# Altium PCB SteeringWheel_v2.PcbDoc
Units mm, origin at the board's own origin, x right, y up, seen from the top; angles counter-clockwise.
Board outline 76.9 x 45 mm, 2 copper layers (Top Layer, Bottom Layer); 28 components, 59 nets, 189 pads, 5 vias.
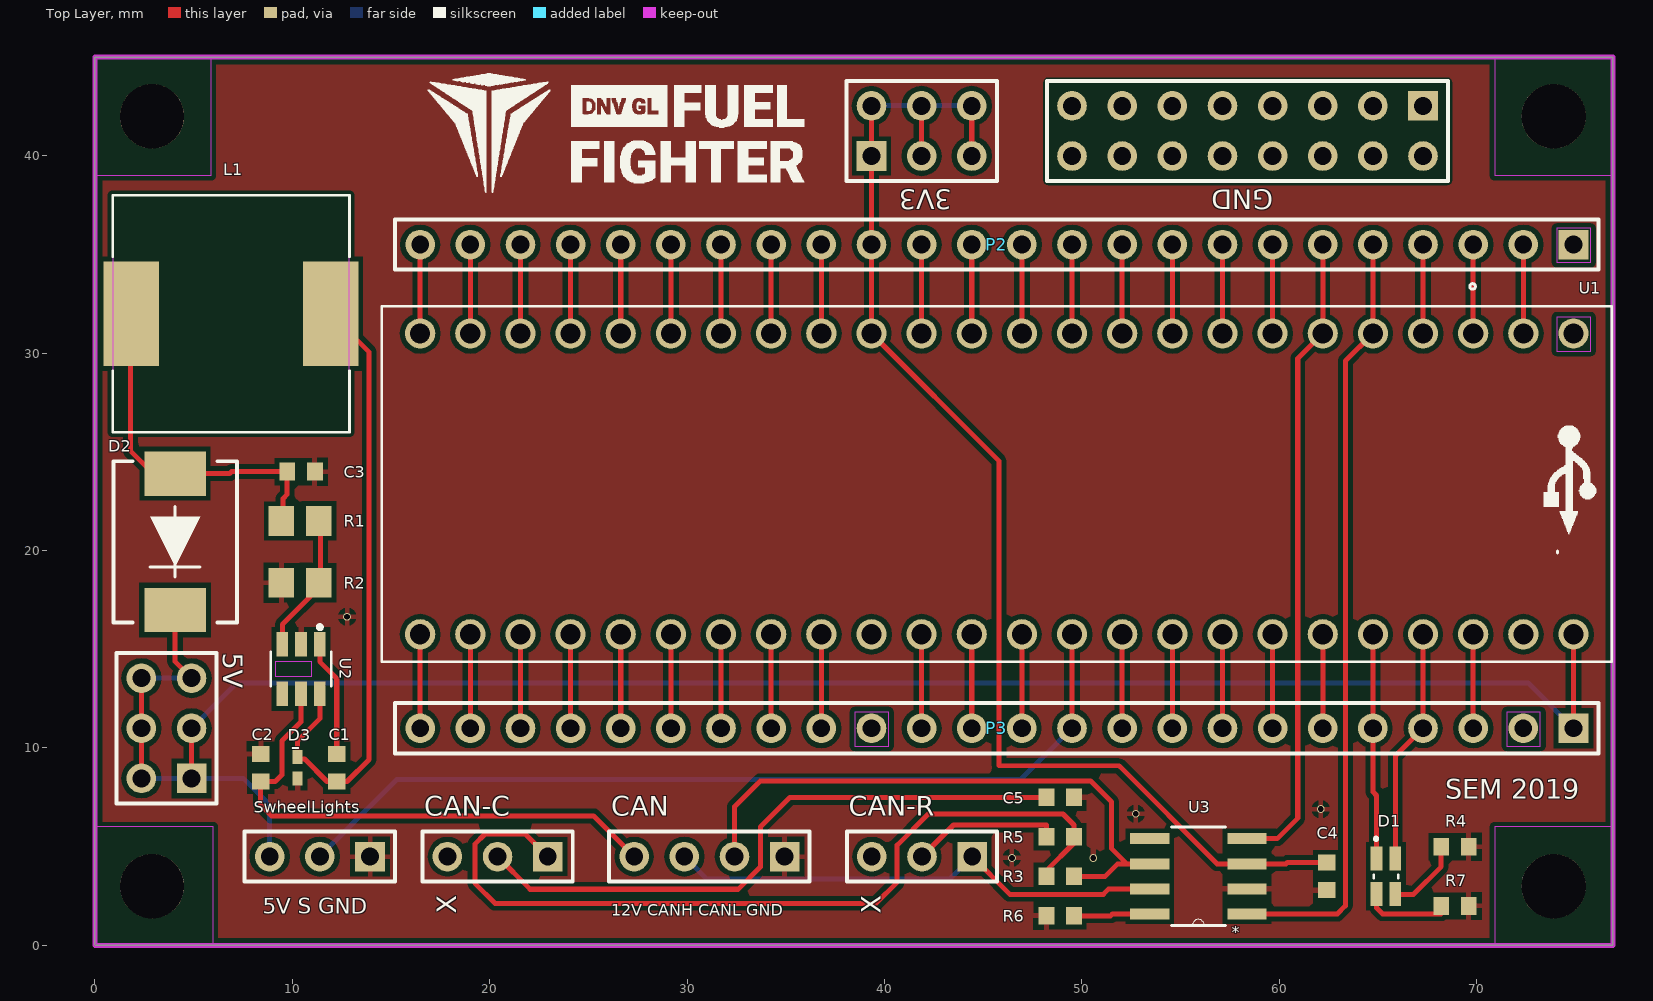
[diagram p0: Top Layer view]
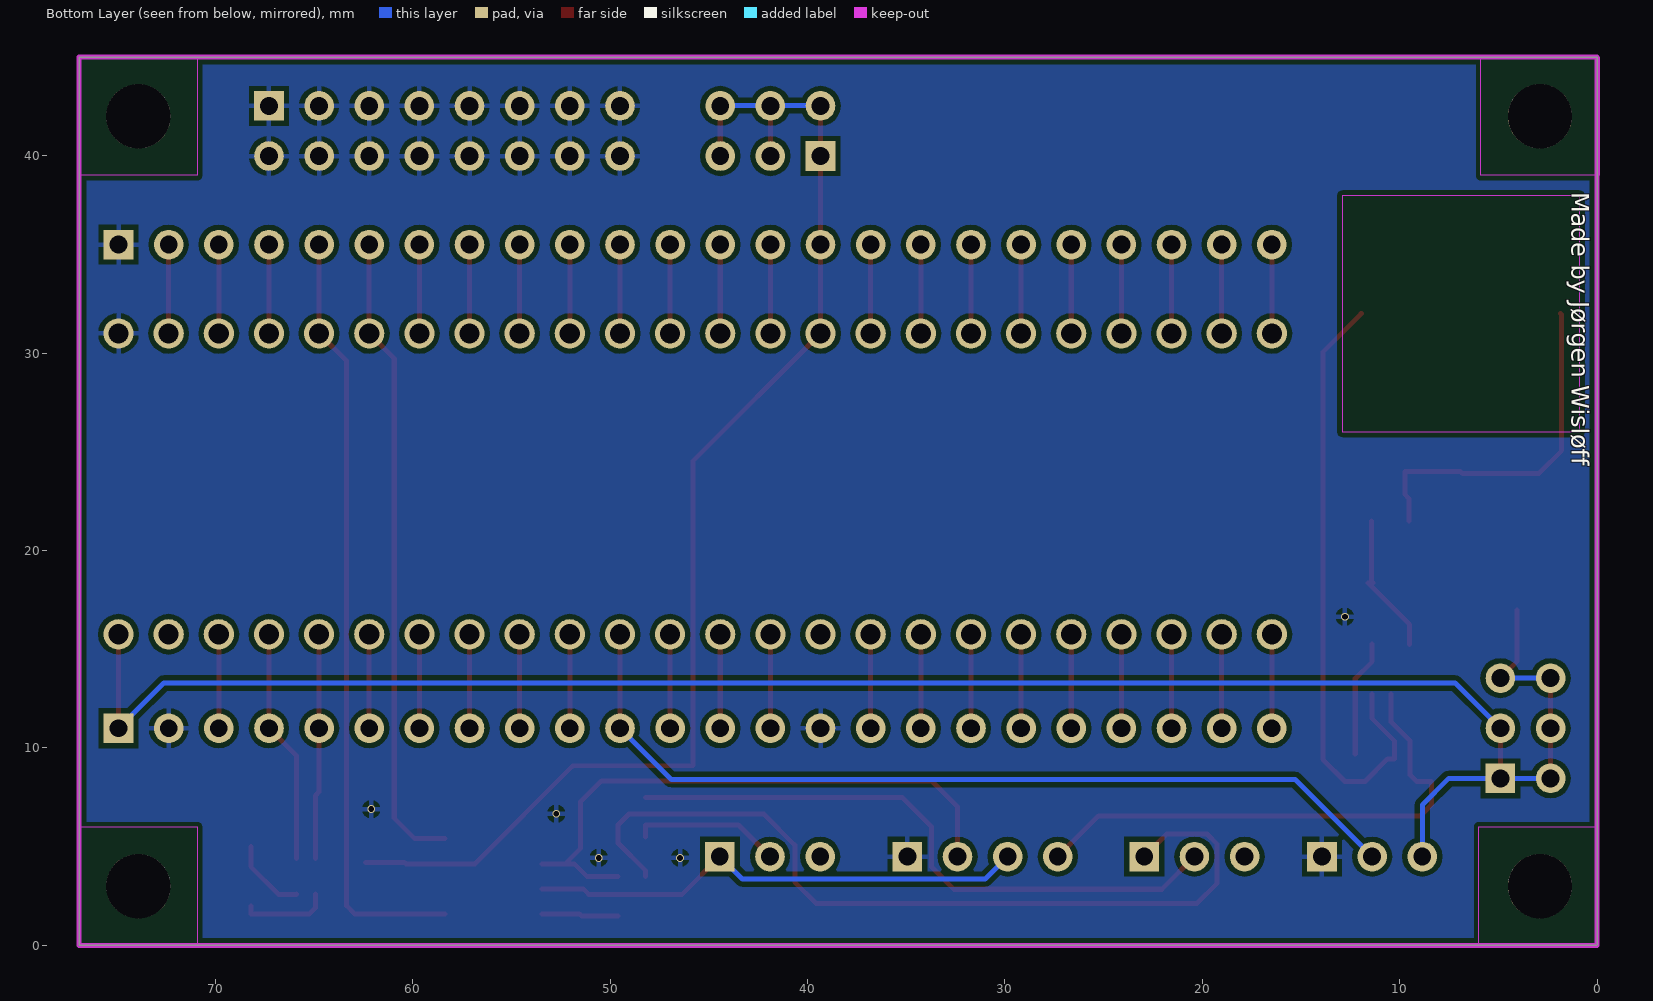
[diagram p1: Bottom Layer view, seen from below]

## Layer stack, top to bottom
Top Solder: solder mask 0.0102, Solder Resist, Dk 3.5
Top Layer: signal copper 0.0356
Dielectric 1: dielectric 0.32, FR-4, Dk 4.8
Bottom Layer: signal copper 0.0356
Bottom Solder: solder mask 0.0102, Solder Resist, Dk 3.5

## Board outline
0,0 76.9,0 76.9,45 0,45

## Design rules (kind name [scope] priority, off if disabled: settings)
Clearance [All] p1: gap=0.254 ignorepadtopadclearanceinfootprint=FALSE except(0: Arc-Hole Track-Hole SMDPad-Hole THPad-Hole Via-Hole Fill-Hole Poly-Hole Region-Hole Text-Hole)
PolygonConnect [All] p1: connectstyle=Relief reliefconductorwidth=0.254 reliefentries=4 polygonreliefangle="90 Angle" airgapwidth=0.254
RoutingVias [All] p1: holewidth=0.711 width=1.27 viastyle="Through Hole" minholewidth=0.711 minwidth=1.27 maxholewidth=0.711 maxwidth=1.27
SolderMaskExpansion [All] p1: expansion=0.102
Width [All] p1: maxlimit=0.254 minlimit=0.254 preferedwidth=0.254
30 further rules are at their usual default settings.

## Components (designator, comment, footprint, x,y, rotation, side; value= is the part's Value field where it differs from the comment)
3V3 "Header 3X2" HDR2X3 39.34,39.984 r0 top
5V "Header 3X2" HDR2X3 4.9,8.46 r90 top
C1 "29.6mOhm" 1608[0603] 12.254,9 r90 top value=100nF
C2 "4.796mOhm" 1608[0603] 8.4,9 r270 top value=3.3uF
C3 "4.796mOhm" 1608[0603] 10.446,24 r180 top value=3.3uF
C4 "" 1608[0603] 62.4,3.5 r90 top value=100nF
C5 "4.796mOhm" 1608[0603] 48.9,7.5 r180 top value=100nF
CAN "Header 4" HDR1X4 34.94,4.5 r180 top
CAN-C "Header 3" HDR1X3 22.94,4.5 r180 top
CAN-R "Header 3" HDR1X3 44.44,4.5 r180 top
D1 "APHBM2012LVBDZGKC" *KINGBRIGHT_APHBM2012LVBDZGKC 65.4,3.5 r270 top
D2 "SMC30J12A" *DIOM7959X265_SMC30J12A(Primary) 4.066,20.446 r90 top
D3 "550mV, 100mA" *SOD523 10.273,9 r270 top
GND "Header 8X2" HDR2X8 67.28,42.524 r180 top
L1 "Inductor" *IND_SRR1210-220M 6.9,32 r270 top value="180uH 250mOhm"
P2 "Header 24" HDR1X24 74.9,35.5 r180 top
P3 "Header 24" HDR1X24 74.9,11 r180 top
R1 "Res2" *RESC2012X60 10.4,21.5 r180 top value=111kOhm
R2 "Res2" *RESC2012X60 10.4,18.37 r0 top value=20kOhm
R3 "Res2" 1608[0603] 48.9,3.5 r180 top value=60
R4 "Res2" 1608[0603] 68.9,5 r0 top value=250
R5 "Res2" 1608[0603] 48.9,5.5 r180 top value=60
R6 "Res2" 1608[0603] 48.9,1.5 r180 top value=22K
R7 "Res2" 1608[0603] 68.9,2 r0 top value=250
SwheelLights "Header 3" HDR1X3 13.94,4.5 r180 top
U1 "DEV-14058" *SPARKFUN_DEV-14058_DEV-14058(Primary) 45.69,23.38 r270 top
U2 "LMR14010ADDC" *SOT95P280X110-6N 10.446,14 r270 top
U3 "SN65HVD231D" *SOIC127P600X175-8N 55.9,3.5 r180 top

## Footprints (in the part's own frame and the unit in brackets; to place one, negate y for a bottom-side part, rotate by r counter-clockwise, add the part's x,y. Pads: shape width x height; smd on the part's side, far side on the other; paste and mask are expansions set on the pad)
1608[0603] [mm] "Chip Capacitor, Body 1.6x0.8mm, IPC High Density"
  rect 0.8x0.9 smd: 1(-0.7,0) 2(0.7,0)
  body extent -0.87,-0.48 0.87,0.48, height 1.3
*DIOM7959X265_SMC30J12A(Primary) [mm]
  rect 2.25x3.12 smd: A(3.455,0) C(-3.455,0)
  silkscreen extent -4.08,-3.13 4.08,3.13
*IND_SRR1210-220M [mm]
  rect 5.3x2.8 smd: 1(0,5.05) 2(0,-5.05)
  silkscreen extent -6,-6 6,6
*KINGBRIGHT_APHBM2012LVBDZGKC [mm]
  rect 1.2x0.6 smd: 1(-0.9,-0.475) 2(0.9,-0.475) 3(0.9,0.475) 4(-0.9,0.475)
  silkscreen extent -1.98,-0.63 0.09,0.62
*RESC2012X60 [mm]
  rect 1.3x1.5 smd: 1(-0.95,0) 2(0.95,0)
*SOD523 [mm]
  rect 0.7x0.5 smd: 1(0.55,0) 2(-0.55,0)
*SOIC127P600X175-8N [mil]
  rect 78x22 smd: 1(-97,75) 2(-97,25) 3(-97,-25) 4(-97,-75) 5(97,-75) 6(97,-25) 7(97,25) 8(97,75)
  silkscreen extent -54,-98 54,98
*SOT95P280X110-6N [mm]
  rect 1.25x0.59 smd: 1(-1.255,0.95) 2(-1.255,0) 3(-1.255,-0.95) 4(1.255,-0.95) 5(1.255,0) 6(1.255,0.95)
  silkscreen extent -2.22,-1.53 0.88,1.53
*SPARKFUN_DEV-14058_DEV-14058(Primary) [mm]
  round 1.53 hole 1.02: 0(-7.62,26.67) 1(-7.62,24.13) 2(-7.62,21.59) 3(-7.62,19.05) 3V3_1(-7.62,-6.35) 3V3_2(7.62,24.13) 4(-7.62,16.51) 5(-7.62,13.97) 6(-7.62,11.43) 7(-7.62,8.89) 8(-7.62,6.35) 9(-7.62,3.81) 10(-7.62,1.27) 11(-7.62,-1.27) 12(-7.62,-3.81) 13(7.62,-3.81) 14(7.62,-1.27) 15(7.62,1.27) 16(7.62,3.81) 17(7.62,6.35) 18(7.62,8.89) 19(7.62,11.43) 20(7.62,13.97) 21(7.62,16.51) 22(7.62,19.05) 23(7.62,21.59) 24(-7.62,-8.89) 25(-7.62,-11.43) 26(-7.62,-13.97) 27(-7.62,-16.51) 28(-7.62,-19.05) 29(-7.62,-21.59) 30(-7.62,-24.13) 31(-7.62,-26.67) 32(-7.62,-29.21) 33(7.62,-29.21) 34(7.62,-26.67) 35(7.62,-24.13) 36(7.62,-21.59) 37(7.62,-19.05) 38(7.62,-16.51) 39(7.62,-13.97) A21(7.62,-11.43) A22(7.62,-8.89) AGND(7.62,26.67) GND_1(-7.62,29.21) GND_2(7.62,-6.35) VIN(7.62,29.21)
  silkscreen extent -10.14,-31.15 9,31.15
HDR1X3 [mm] "Connector; Header; 3 Position"
  rect 1.5x1.5 hole 0.9: 1(0,0)
  round 1.5 hole 0.9: 2(2.54,0) 3(5.08,0)
  silkscreen extent -1.27,-1.27 6.35,1.27
HDR1X4 [mm] "Connector; Header; 4 Position"
  rect 1.5x1.5 hole 0.9: 1(0,0)
  round 1.5 hole 0.9: 2(2.54,0) 3(5.08,0) 4(7.62,0)
  silkscreen extent -1.27,-1.27 8.89,1.27
HDR1X24 [mm] "Connector; Header; 24 Position"
  rect 1.5x1.5 hole 0.9: 1(0,0)
  round 1.5 hole 0.9: 2(2.54,0) 3(5.08,0) 4(7.62,0) 5(10.16,0) 6(12.7,0) 7(15.24,0) 8(17.78,0) 9(20.32,0) 10(22.86,0) 11(25.4,0) 12(27.94,0) 13(30.48,0) 14(33.02,0) 15(35.56,0) 16(38.1,0) 17(40.64,0) 18(43.18,0) 19(45.72,0) 20(48.26,0) 21(50.8,0) 22(53.34,0) 23(55.88,0) 24(58.42,0)
  silkscreen extent -1.27,-1.27 59.69,1.27
HDR2X3 [mm] "Connector; Header; 3x2 Position"
  rect 1.5x1.5 hole 0.9: 1(0,0)
  round 1.5 hole 0.9: 2(0,2.54) 3(2.54,0) 4(2.54,2.54) 5(5.08,0) 6(5.08,2.54)
  silkscreen extent -1.27,-1.27 6.35,3.81
HDR2X8 [mm] "Connector; Header; 8x2 Position"
  rect 1.5x1.5 hole 0.9: 1(0,0)
  round 1.5 hole 0.9: 2(0,2.54) 3(2.54,0) 4(2.54,2.54) 5(5.08,0) 6(5.08,2.54) 7(7.62,0) 8(7.62,2.54) 9(10.16,0) 10(10.16,2.54) 11(12.7,0) 12(12.7,2.54) 13(15.24,0) 14(15.24,2.54) 15(17.78,0) 16(17.78,2.54)
  silkscreen extent -1.27,-1.27 19.05,3.81

## Part data
3V3 5V: "Header, 3-Pin, Dual row", LatestRevisionDate=17-Jul-2002, LatestRevisionNote="Re-released for DXP Platform.", Publisher="Altium Limited"
C1 C2 C3 C4 C5: library part Cap, "Capacitor", LatestRevisionDate=17-Jul-2002, LatestRevisionNote="Re-released for DXP Platform.", PackageDescription="Radial Cap, Thru-Hole; 2 Leads; 0.3 in Pin Spacing", PackageReference=RAD-0.3, Published=8-Jun-2000, Publisher="Altium Limited"
CAN: "Header, 4-Pin", LatestRevisionDate=17-Jul-2002, LatestRevisionNote="Re-released for DXP Platform.", Publisher="Altium Limited"
CAN-C CAN-R SwheelLights: "Header, 3-Pin", LatestRevisionDate=17-Jul-2002, LatestRevisionNote="Re-released for DXP Platform.", Publisher="Altium Limited"
D1: "HELI Colour; 2.0X1.2MM LOW CURRENT BLUE/GREEN SMD LED", Package="0805 Kingbright", Availability=Unavailable, MF=Kingbright, MP=APHBM2012LVBDZGKC, Price=None, SnapEDA_Link=https://www.snapeda.com/parts/APHBM2012LVBDZGKC/Kingbright/view-part/?ref=snap
D2: "Transient Voltage Suppressor, TVS, Transil SMC30J Series, Unidirectional, 12 V, DO-214AB, 2", Package="DO-214 STMicroelectronics", Availability=Unavailable, MF=STMicroelectronics, MP=SMC30J12A, Price=None, SnapEDA_Link=https://www.snapeda.com/parts/SMC30J12A/STMicroelectronics/view-part/?ref=snap
D3: library part "D Zener", "Zener Diode", LatestRevisionDate=17-Jul-2002, LatestRevisionNote="Re-released for DXP Platform.", PackageDescription="Diode, Thru-Hole; 2 Leads; 0.7 in Pin Spacing", PackageReference=DIODE-0.7, Published=8-Jun-2000, Publisher="Altium Limited"
GND: "Header, 8-Pin, Dual row", LatestRevisionDate=17-Jul-2002, LatestRevisionNote="Re-released for DXP Platform.", Publisher="Altium Limited"
P2 P3: "Header, 24-Pin", LatestRevisionDate=17-Jul-2002, LatestRevisionNote="Re-released for DXP Platform.", Publisher="Altium Limited"
R1 R2 R3 R4 R5 R6 R7: "Resistor", LatestRevisionDate=17-Jul-2002, LatestRevisionNote="Re-released for DXP Platform.", PackageDescription="Axial Device, Thru-Hole; 2 Leads; 0.4 in Pin Spacing", PackageReference=AXIAL-0.4, Published=8-Jun-2000, Publisher="Altium Limited"
U1: "Teensy 3.6 _Headers_", Package=None, Digi-Key_Part_Number=1568-1465-ND, Digi-Key_Purchase_URL=https://www.digikey.no/product-detail/en/sparkfun-electronics/DEV-14058/1568-1465-ND/6569369?utm_source=snapeda&utm_medium=aggregator&utm_campaign=symbol, MF="SparkFun Electronics", MP=DEV-14058, SnapEDA_Link=https://www.snapeda.com/parts/DEV-14058/SparkFun%20Electronics/view-part/?ref=snap
U3: "3.3V CAN Transceiver with Sleep Mode, 17 mA, 3.3 V, -40 to 85 degC, 8-pin SOIC (D), Green (RoHS & no Sb/Br)", Drivers Per Package=1, Low Power Mode=Sleep, Manufacturer="Texas Instruments", Rating=Catalog, Supplier Part Number 1=296-12206-5-ND, Supply Voltage(s)(V)=3.3, Code_JEDEC=MS-012AA, ComponentLink1Description=Datasheet, ComponentLink1URL=http://www.ti.com/general/docs/lit/getliterature.tsp?genericPartNumber=SN65HVD231&fileType=pdf, DatasheetVersion=SLOS346K, Eco-Plan="Green (RoHS & no Sb/Br)", Features="Bus Wake Up", ICC(Max)(mA)=17, Isolated=No, Mounting Technology="Surface Mount", PackageDescription="8-Pin Plastic Small Outline Integrated Circuit, 4.9 x 3.9 mm, Pitch 1.27 mm Pitch", PackageReference=D8, PackageVersion="revM, Jun-2011", PartNumber=SN65HVD231D, Receivers Per Package=1, SubFamily=CAN, Supplier 1=Digi-Key, Supplier 2=Farnell, Supplier 3=Newark, Supplier 4=Mouser, Supplier Part Number 2=1106059, Supplier Part Number 3=75C7748, Supplier Part Number 4=595-SN65HVD231D, Transient Pulse Protection(V)="-25 to 25"
L1: Code_IEC=1005, Code_JEITA=0402, LatestRevisionDate=29-May-2009, LatestRevisionNote="IPC-7351 Footprint Added.", PackageDescription="Chip Inductor", PackageReference=0402-A, Published=8-Jun-2000, Publisher="Altium Limited"

## Free pads (board coordinates)
  round 3.25 hole 3.25: 2(2.9,3) 2(2.9,42) 2(73.9,3) 2(73.9,42)

## Via types
v1: diameter 0.4, hole 0.3, Top Layer to Bottom Layer, 5 vias

## Nets (pads, with @x,y where several pads share a name; then routed paths per layer and width w, separated by ;. In a path a pad name is that pad's centre, name@x,y a point inside that pad or via, vN(x,y) a via of type N, cw(c..) or ccw(c..) an arc to the next point about the centre after c; other vN are vias at no path point)
3V3: 3V3.1 3V3.2 3V3.3 3V3.4 3V3.5 3V3.6 C4.2 P2.15 U1.3V3_1 U3.3 | length 64.9
  Top Layer w0.254: 3V3.2@39.34,42.54 3V3.2 3V3.1 P2.15 U1.3V3_1 45.795,24.545 45.795,9.119 51.886,9.093 56.844,4.135 U3.3 60.349,4.135 60.414,4.2 C4.2 ; 3V3.3@41.88,40 3V3.4 3V3.4@41.88,42.54 ; 3V3.5@44.42,40 3V3.6 3V3.6@44.42,42.54
  Bottom Layer w0.254: 3V3.2@39.34,42.54 3V3.6@44.42,42.54
+5: 5V.1 5V.2 5V.3 5V.4 5V.5 5V.6 D2.C P3.1 SwheelLights.3 U1.VIN | length 100.3
  Top Layer w0.254: 5V.2 5V.4 5V.6 ; D2.C 4.066,14.374 5V.5 ; 5V.1 5V.3 ; P3.1 U1.VIN
  Bottom Layer w0.254: 5V.2 5V.1 7.512,8.46 8.86,7.112 SwheelLights.3 ; 5V.6 5V.5 ; 5V.3 7.2,13.3 72.6,13.3 P3.1
+12: C2.2 CAN.4 U2.5 | length 26.9
  Top Layer w0.254: U2.5 10.446,11.328 9.473,10.355 9.473,8.636 9.137,8.3 C2.2 8.4,7.112 8.959,6.553 25.267,6.553 CAN.4
GND: C2.1 C3.1 C4.1 C5.1 CAN.1 D3.1 GND.1 GND.2 GND.3 GND.4 GND.5 GND.6 GND.7 GND.8 GND.9 GND.10 GND.11 GND.12 GND.13 GND.14 GND.15 GND.16 P2.1 P3.2 P3.15 R2.1 R4.2 R6.2 R7.2 SwheelLights.1 U1.GND_1 U2.2 U3.2
  other v1: 46.454,4.435 50.573,4.435 52.727,6.669 62.1,6.9 12.778,16.65
NetC1_1: C1.1 D3.2 L1.1 U2.6 | length 31.7
  Top Layer w0.254: U2.6 11.396,11.486 10.273,10.363 D3.2 10.273,9.449 10.616,9.449 11.765,8.3 C1.1 12.778,8.3 13.9,9.422 13.9,30.05 L1.1
NetC1_2: C1.2 U2.1 | length 5.9
  Top Layer w0.254: U2.1 11.396,14.376 12.254,13.518 C1.2
NetC3_2: C3.2 D2.A L1.2 R1.2 | length 18
  Top Layer w0.254: L1.2 1.8,31.95 1.8,25.06 2.959,23.901 D2.A 6.831,23.901 6.931,24 C3.2 9.746,22.846 9.531,22.631 R1.2@9.531,21.5
NetC5_2: C5.2 CAN-C.2 | length 31.6
  Top Layer w0.254: CAN-C.2 22.055,2.845 32.587,2.845 33.719,3.977 33.719,6.009 35.21,7.5 C5.2
NetCAN-C_1: CAN-C.1 R3.2 R5.1 | length 43.5
  Top Layer w0.254: CAN-C.1 21.801,5.639 19.76,5.639 19.252,5.131 19.252,3.15 20.268,2.134 39.572,2.134 40.639,3.2 40.639,5.08 42.214,6.655 49.041,6.655 49.6,6.096 R5.1 49.6,5.185 48.2,3.785 R3.2
NetCAN-R_2: CAN-R.2 R5.2 | length 7.6
  Top Layer w0.254: CAN-R.2 43.496,6.096 48.2,6.096 R5.2
NetCAN_2: CAN.2 R3.1 U3.6 | length 30.2
  Top Layer w0.254: CAN.2 32.4,7.027 33.705,8.331 50.443,8.331 51.51,7.264 51.51,4.897 52.272,4.135 ; R3.1 51.18,3.5 51.815,4.135 52.272,4.135 ; U3.6 52.272,4.135
NetCAN_3: CAN-R.1 CAN.3 U3.7 | length 25.4
  Top Layer w0.254: CAN-R.1 46.349,2.591 51.083,2.591 51.358,2.865 U3.7
  Bottom Layer w0.254: CAN.3 31.007,3.353 43.293,3.353 CAN-R.1
NetD1_1: D1.1 P3.5 U1.22 | length 11.4
  Top Layer w0.254: U1.22 P3.5 64.74,7.78 64.925,7.595 D1.1
NetD1_2: D1.2 R7.1 | length 4.5
  Top Layer w0.254: D1.2 64.925,1.901 65.226,1.6 68.2,1.6 R7.1
NetD1_3: D1.3 R4.1 | length 3.9
  Top Layer w0.254: D1.3 65.875,2.591 66.801,2.591 68.2,3.99 R4.1
NetD1_4: D1.4 P3.4 U1.23 | length 11.9
  Top Layer w0.254: D1.4 65.875,9.595 P3.4 U1.23
NetP2_2: P2.2 U1.0 | length 4.5
  Top Layer w0.254: U1.0 P2.2
NetP2_3: P2.3 U1.1 | length 4.5
  Top Layer w0.254: U1.1 P2.3
NetP2_4: P2.4 U1.2 | length 4.5
  Top Layer w0.254: U1.2 P2.4
NetP2_5: P2.5 U1.3 U3.1 | length 39.2
  Top Layer w0.254: U3.1 62.94,1.595 63.346,2.001 63.346,29.606 U1.3 P2.5
NetP2_6: P2.6 U1.4 U3.4 | length 32.6
  Top Layer w0.254: U3.4 59.892,5.405 60.933,6.446 60.933,29.733 U1.4 P2.6
NetP2_7: P2.7 U1.5 | length 4.5
  Top Layer w0.254: U1.5 P2.7
NetP2_8: P2.8 U1.6 | length 4.5
  Top Layer w0.254: U1.6 P2.8
NetP2_9: P2.9 U1.7 | length 4.5
  Top Layer w0.254: U1.7 P2.9
NetP2_10: P2.10 U1.8 | length 4.5
  Top Layer w0.254: U1.8 P2.10
NetP2_11: P2.11 U1.9 | length 4.5
  Top Layer w0.254: U1.9 P2.11
NetP2_12: P2.12 U1.10 | length 4.5
  Top Layer w0.254: U1.10 P2.12
NetP2_13: P2.13 U1.11 | length 4.5
  Top Layer w0.254: U1.11 P2.13
NetP2_14: P2.14 U1.12 | length 4.5
  Top Layer w0.254: U1.12 P2.14
NetP2_16: P2.16 U1.24 | length 4.5
  Top Layer w0.254: U1.24 P2.16
NetP2_17: P2.17 U1.25 | length 4.5
  Top Layer w0.254: U1.25 P2.17
NetP2_18: P2.18 U1.26 | length 4.5
  Top Layer w0.254: U1.26 P2.18
NetP2_19: P2.19 U1.27 | length 4.5
  Top Layer w0.254: U1.27 P2.19
NetP2_20: P2.20 U1.28 | length 4.5
  Top Layer w0.254: U1.28 P2.20
NetP2_21: P2.21 U1.29 | length 4.5
  Top Layer w0.254: U1.29 P2.21
NetP2_22: P2.22 U1.30 | length 4.5
  Top Layer w0.254: U1.30 P2.22
NetP2_23: P2.23 U1.31 | length 4.5
  Top Layer w0.254: U1.31 P2.23
NetP2_24: P2.24 U1.32 | length 4.5
  Top Layer w0.254: U1.32 P2.24
NetP3_3: P3.3 U1.3V3_2 | length 4.8
  Top Layer w0.254: P3.3 U1.3V3_2
NetP3_6: P3.6 U1.21 | length 4.8
  Top Layer w0.254: P3.6 U1.21
NetP3_7: P3.7 U1.20 | length 4.8
  Top Layer w0.254: P3.7 U1.20
NetP3_8: P3.8 U1.19 | length 4.8
  Top Layer w0.254: P3.8 U1.19
NetP3_9: P3.9 U1.18 | length 4.8
  Top Layer w0.254: P3.9 U1.18
NetP3_10: P3.10 U1.17 | length 4.8
  Top Layer w0.254: P3.10 U1.17
NetP3_11: P3.11 SwheelLights.2 U1.16 | length 45.6
  Top Layer w0.254: P3.11 U1.16
  Bottom Layer w0.254: SwheelLights.2 15.3,8.4 46.9,8.4 P3.11
NetP3_12: P3.12 U1.15 | length 4.8
  Top Layer w0.254: P3.12 U1.15
NetP3_13: P3.13 U1.14 | length 4.8
  Top Layer w0.254: P3.13 U1.14
NetP3_14: P3.14 U1.13 | length 4.8
  Top Layer w0.254: P3.14 U1.13
NetP3_16: P3.16 U1.A22 | length 4.8
  Top Layer w0.254: P3.16 U1.A22
NetP3_17: P3.17 U1.A21 | length 4.8
  Top Layer w0.254: P3.17 U1.A21
NetP3_18: P3.18 U1.39 | length 4.8
  Top Layer w0.254: P3.18 U1.39
NetP3_19: P3.19 U1.38 | length 4.8
  Top Layer w0.254: P3.19 U1.38
NetP3_20: P3.20 U1.37 | length 4.8
  Top Layer w0.254: P3.20 U1.37
NetP3_21: P3.21 U1.36 | length 4.8
  Top Layer w0.254: P3.21 U1.36
NetP3_22: P3.22 U1.35 | length 4.8
  Top Layer w0.254: P3.22 U1.35
NetP3_23: P3.23 U1.34 | length 4.8
  Top Layer w0.254: P3.23 U1.34
NetP3_24: P3.24 U1.33 | length 4.8
  Top Layer w0.254: P3.24 U1.33
NetR1_1: R1.1 R2.2 U2.3 | length 7.4
  Top Layer w0.254: U2.3 9.496,16.256 11.61,18.37 R2.2 11.431,18.451 R1.1@11.431,21.5
NetR6_1: R6.1 U3.8 | length 3.9
  Top Layer w0.254: R6.1 51.459,1.5 51.554,1.595 U3.8
pads on no net: CAN-C.3 CAN-R.3 U1.AGND U1.GND_2 U2.4 U3.5

## Polygon pours and split planes (outlines as drawn)
no net on Drill Drawing (solid): -3.1,0
GND on Top Layer "Top Layer-GND" (solid, pour order 12): 0,0 0,45 76.9,45 76.9,0
no net on Top Layer "Top Layer-No Net" (solid, pour order 2): -15.6,13
GND on Bottom Layer "Bottom Layer-GND" (solid, pour order 10): 0,0 0,45 76.9,45 76.9,0
no net on Bottom Layer "Bottom Layer-No Net" (solid, pour order 6): 58.4,-9

## Keep-outs
Top Layer:
  rectangle: 9.137,13.624 11,14.376
  rectangle: 48.3,38.761 68.5,43.7
  rectangle: 74.06,34.6 75.767,36.321
  rectangle: 74.06,30.1 75.767,31.821
  rectangle: 71.52,10.1 73.227,11.821
  rectangle: 38.5,10.1 40.207,11.821
Keep-Out Layer:
  rectangle: 0.9,26 12.9,38
  rectangle: -0.1,39 5.9,45
  rectangle: 70.9,39 76.9,45
  rectangle: 70.9,0 76.9,6
  rectangle: 0,0 6,6
  lines w0.254: 0,0 76.9,0 76.9,45 56.9,45 16.9,45 0,45 0,0

## Silkscreen, mask and mechanical layers (free items; w line width, h text height)
Top Overlay:
  drawing of 19 lines, arcs and shapes, not listed
  text "-" at 9.93,9.6 h1
  text "SEM 2019" at 68.4,7.434 h1
  text "5V S GND" at 8.5,1.6 h0.8
  text "X" at 18.3,1.6 h1 r90
  text "X" at 39.8,1.6 h1 r90
  text "12V CANH CANL GND" at 26.161,1.5 h0.6
  text "*" at 57.6,0.4 h0.6
Bottom Overlay:
  text "Made by Jørgen Wisløff" at 1.6,38.154 h1.52 r90